# EAGLE board PCB (EAGLE 9.7.0)
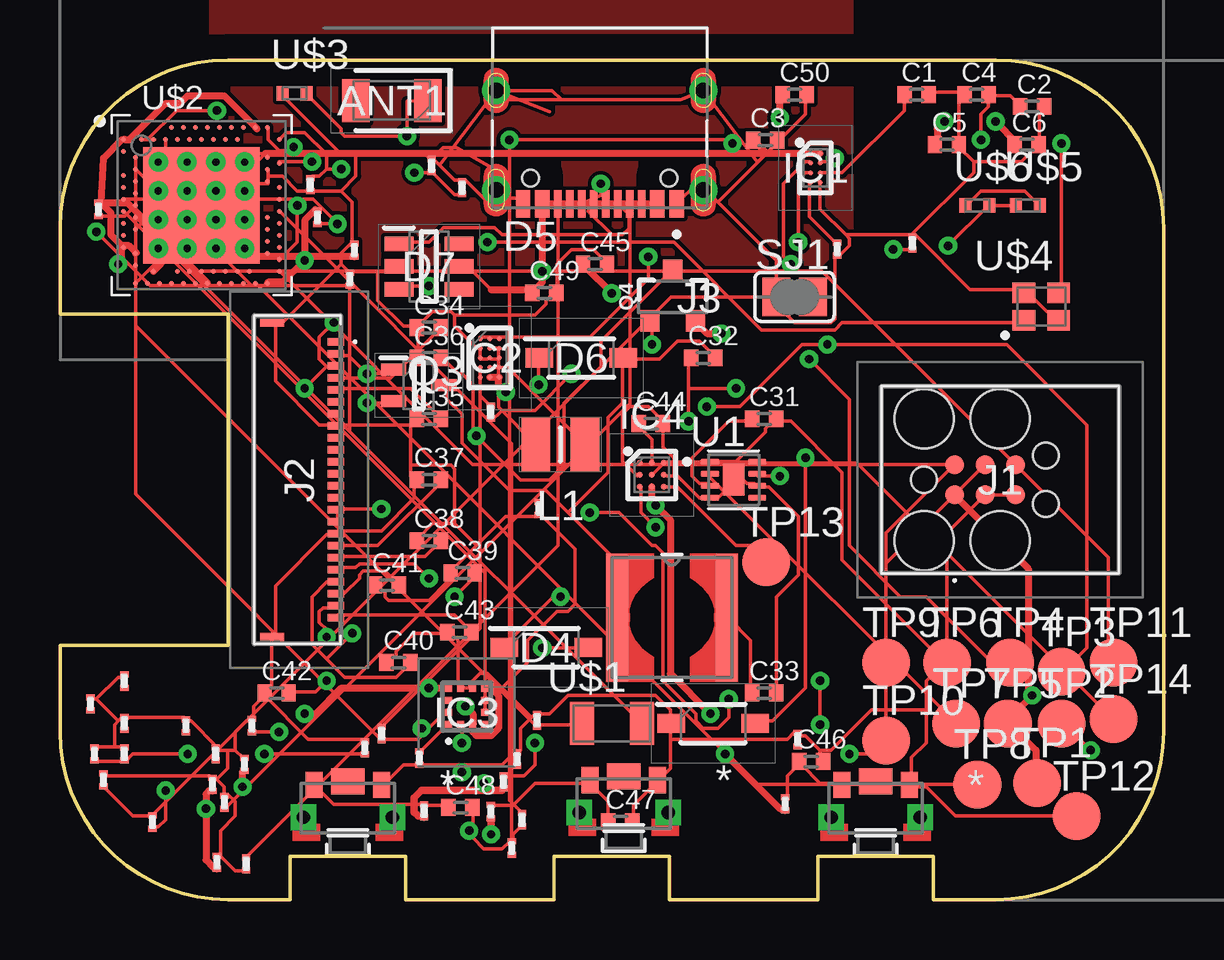
[diagram p0: board, top side]
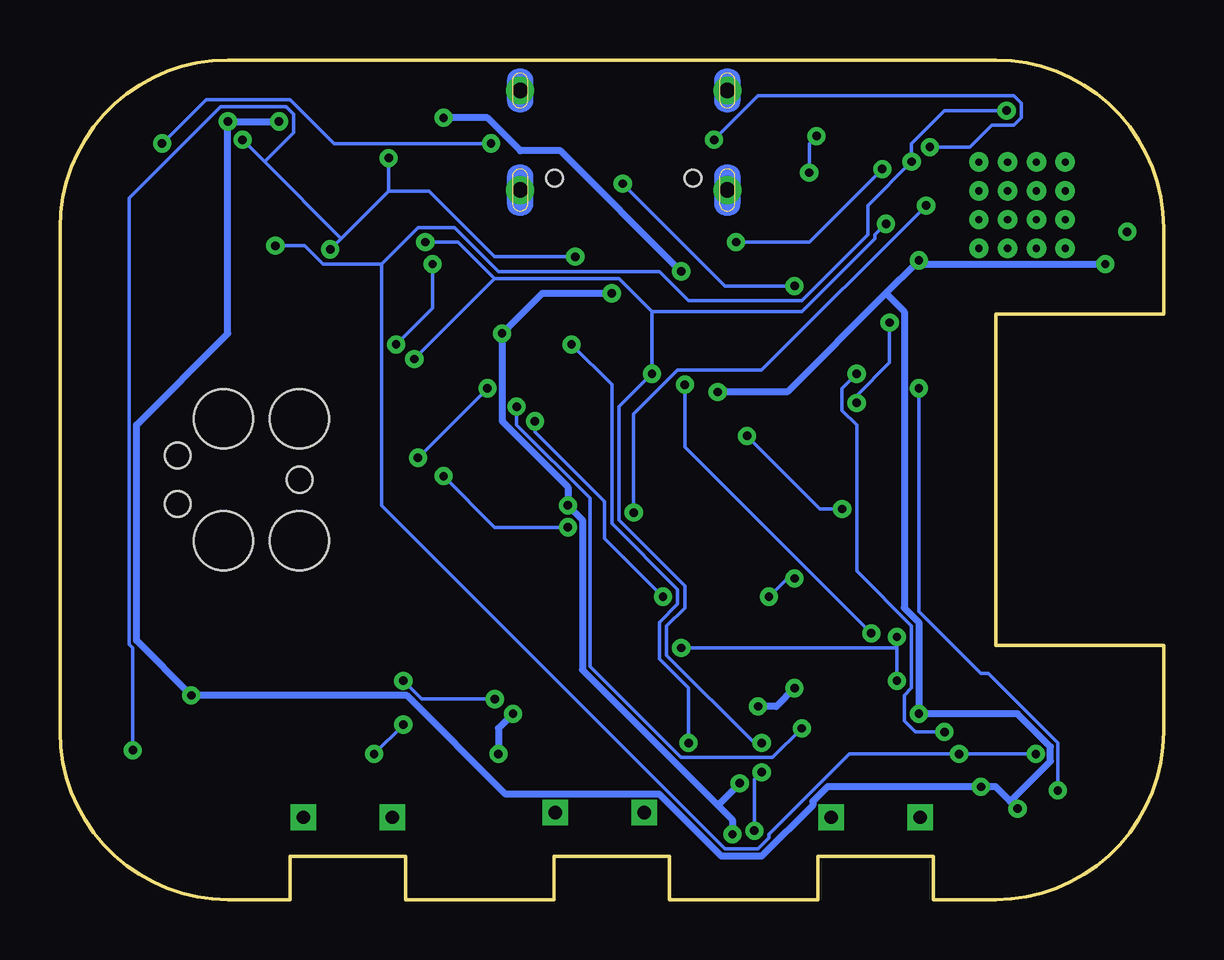
[diagram p1: board, bottom side, seen from below]

Size 46 x 35 mm. Coordinates in mm from the lower left corner, seen from the top.
Outline: 39,0 36.4,0 36.4,1.8 31.6,1.8 31.6,0 25.4,0 25.4,1.8 20.6,1.8 20.6,0 14.4,0 14.4,1.8 9.6,1.8 9.6,0 7,0 arc-90 0,7 0,10.6 7,10.6 7,24.4 0,24.4 0,28 arc-90 7,35 39,35 arc-90 46,28 46,7 arc-90 39,0
Copper layers (1*16): Top 0.035mm / dielectric 1.5mm / Bottom 0.035mm
Design rules "Fusion Electronics Design Rules *": minimum track width 6mil, minimum drill 0.2mm, track to track 6mil, track to pad 6mil, pad to pad 6mil, via to via 6mil, smd to smd 6mil, copper to edge 40mil, drill to drill 6mil, minimum pad ring 10mil, minimum via ring 8mil, stop-mask expansion 4mil, vias tented up to drill 9999mil, thermal gap 10mil

## Footprints (pad centres in the part's own frame; a part is rotated, then mirrored left to right if it is on the bottom)
2450AT18B100E_ANTC3216X140N = smd 1.15 x 1.8: 1 -1.5,0; 2 1.5,0
PERFECT_0402_0402 = smd 0.6 x 0.7: 1 -0.5,0; 2 0.5,0
GRM011R60J152KE01L_1_0201 = smd 0.35 x 0.25: 1 0,0.275; 2 0,-0.275
ESP32_C6_LIBRARY_5_SOD3716X135N = smd 1.15 x 0.8: 1 -1.75,0; 2 1.75,0
ESP32_C6_LIBRARY_3_SOT95P280X145-6N = smd 1.2 x 0.6: 1 -1.25,0.95; 2 -1.25,0; 3 -1.25,-0.95; 4 1.25,-0.95; 5 1.25,0; 6 1.25,0.95
BQ25180YBGR_BGA8C40P2X4_100X155X50 = smd 0.2 x 0.2: A1 -0.2,0.6; A2 0.2,0.6; B1 -0.2,0.2; B2 0.2,0.2; C1 -0.2,-0.2; C2 0.2,-0.2; D1 -0.2,-0.6; D2 0.2,-0.6
RT6160AWSC_BGA15C40P3X5_140X230X60 = smd 0.216 x 0.216: A1 -0.4,0.8; A2 0,0.8; A3 0.4,0.8; B1 -0.4,0.4; B2 0,0.4; B3 0.4,0.4; C1 -0.4,0; C2 0,0; C3 0.4,0; D1 -0.4,-0.4; D2 0,-0.4; D3 0.4,-0.4; E1 -0.4,-0.8; E2 0,-0.8; E3 0.4,-0.8
BMA423_BMA423 = smd 0.3 x 0.35: 1 -0.75,-0.775; 2 -0.25,-0.775; 3 0.25,-0.775; 4 0.75,-0.775; 7 0.75,0.775; 8 0.25,0.775; 9 -0.25,0.775; 10 -0.75,0.775 | smd 0.35 x 0.3: 5 0.775,-0.25; 6 0.775,0.25; 11 -0.775,0.25; 12 -0.775,-0.25
DRV2605YZFR_BGA9C50P3X3_144X144X62 = smd 0.25 x 0.25: A1 -0.5,0.5; A2 0,0.5; A3 0.5,0.5; B1 -0.5,0; B2 0,0; B3 0.5,0; C1 -0.5,-0.5; C2 0,-0.5; C3 0.5,-0.5
TC2030-IDC_TC2030IDC = smd 0.783 x 0.783: 1 -0.953,-0.635; 2 -0.953,0.635; 3 0.317,-0.635; 4 0.317,0.635; 5 1.588,-0.635; 6 1.588,0.635 | hole 2.451: -2.223,-2.54; -2.223,2.54; 0.952,-2.54; 0.952,2.54 | hole 1.067: -2.223,0; 2.857,-1.016; 2.857,1.016
503480-2400_5034802400 = smd 0.3 x 0.7: 1 -5.75,1.525; 2 -5.25,1.525; 3 -4.75,1.525; 4 -4.25,1.525; 5 -3.75,1.525; 6 -3.25,1.525; 7 -2.75,1.525; 8 -2.25,1.525; 9 -1.75,1.525; 10 -1.25,1.525; 11 -0.75,1.525; 12 -0.25,1.525; 13 0.25,1.525; 14 0.75,1.525; 15 1.25,1.525; 16 1.75,1.525; 17 2.25,1.525; 18 2.75,1.525; 19 3.25,1.525; 20 3.75,1.525; 21 4.25,1.525; 22 4.75,1.525; 23 5.25,1.525; 24 5.75,1.525 | smd 0.3 x 1: MP1 -6.54,-1.125; MP2 6.54,-1.125
KH-TYPE-C-16P_KINGHELM_KH-TYPE-C-16P = smd 0.6 x 1.15: A1_B12 -3.2,4.725; A4_B9 -2.4,4.725; A9_B4 2.4,4.725; A12_B1 3.2,4.725 | smd 0.3 x 1.15: A5 -1.25,4.725; A6 -0.25,4.725; A7 0.25,4.725; A8 1.25,4.725; B5 1.75,4.725; B6 0.75,4.725; B7 -0.75,4.725; B8 -1.75,4.725 | drill 0.65 pad 1.05: SH1 -4.32,0; SH2 4.32,0; SH3 -4.32,4.15; SH4 4.32,4.15 | hole 0.7: -2.89,3.65; 2.89,3.65
MLP2016SR47MT0S1_INDC2016X100N = smd 1.2 x 2.2: 1 -1.028,0; 2 1.028,0
ESP32_C6_LIBRARY_2_IND_4828-WE-TPC_WRE = smd 0.9 x 5.3: 1 -2.286,0; 2 2.286,0
ESP32_C6_LIBRARY_6_SOT65P210X110-3N = smd 1.05 x 0.5: 1 -1.05,0.65; 2 -1.05,-0.65; 3 1.05,0
ESP32_C6_LIBRARY_4_ESP32_C6_LIBRARY_4_ESP32_C6_LIBRARY_4_ESP32_C6_LIBRARY_4_ESP32_WROVER_SPARKFUN-DISCRETESEMI_SOT23-3 = smd 0.8 x 0.9: 1 -0.95,-1; 2 0.95,-1; 3 0,1.1
CPF0201D7K68C1_0201 = smd 0.35 x 0.25: 1 0,0.275; 2 0,-0.275
ESP32_C6_LIBRARY_7_JUMPER_SJ = smd 1.168 x 1.6: 1 -0.762,0; 2 0.762,0
2025-10-22_07-23-44_LIBRARY_SW_EVP-AKE31A_PAN = smd 0.711 x 1.092: 1 -1.4,-0.972; 2 1.4,-0.972 | drill 0.559 pad 0.914 square: 3 -1.848,0.381; 4 1.848,0.381 | smd 1.397 x 1.092: 5 0,-1.124
HECTOR_WATCH_1_TP20R = smd 2 x 2: TP 0,0
ESP32_C6_LIBRARY_SON50P200X200X80-9N = smd 0.76 x 0.27: 1 -0.985,0.75; 2 -0.985,0.25; 3 -0.985,-0.25; 4 -0.985,-0.75; 5 0.985,-0.75; 6 0.985,-0.25; 7 0.985,0.25; 8 0.985,0.75 | smd 0.9 x 1.3: 9 0,0
NORDIC_NRF_1_XTAL_3215_N = smd 1 x 1.8: 1 -1.25,0; 2 1.25,0
NORDIC_NRF_4_AQFN50P700X700X85_HS-74N = smd 4.85 x 4.85: P$74 0,0 | drill 0.3 pad 0.6: P$75 -1.8,1.8; P$76 -0.6,1.8; P$77 0.6,1.8; P$78 1.8,1.8; P$79 -1.8,0.6; P$80 -0.6,0.6; P$81 0.6,0.6; P$82 1.8,0.6; P$83 -1.8,-0.6; P$84 -0.6,-0.6; P$85 0.6,-0.6; P$86 1.8,-0.6; P$87 -1.8,-1.8; P$88 -0.6,-1.8; P$89 0.6,-1.8; P$90 1.8,-1.8 | smd 0.2 x 0.2: P$A8 -1.25,3.25; P$A10 -0.75,3.25; P$A12 -0.25,3.25; P$A14 0.25,3.25; P$A16 0.75,3.25; P$A18 1.25,3.25; P$A20 1.75,3.25; P$A22 2.25,3.25; P$A23 2.75,3.25; P$AA24 3.25,-2.25; P$AB2 -2.75,-2.5; P$AC5 -2,-2.75; P$AC9 -1,-2.75; P$AC11 -0.5,-2.75; P$AC13 0,-2.75; P$AC15 0.5,-2.75; P$AC17 1,-2.75; P$AC19 1.5,-2.75; P$AC21 2,-2.75; P$AC24 3.25,-2.75; P$AD2 -2.75,-3.25; P$AD4 -2.25,-3.25; P$AD6 -1.75,-3.25; P$AD8 -1.25,-3.25; P$AD10 -0.75,-3.25; P$AD12 -0.25,-3.25; P$AD14 0.25,-3.25; P$AD16 0.75,-3.25; P$AD18 1.25,-3.25; P$AD20 1.75,-3.25; P$AD22 2.25,-3.25; P$AD23 2.75,-3.25; P$B1 -3.25,2.75; P$B3 -2.5,2.75; P$B5 -2,2.75; P$B7 -1.5,2.75; P$B9 -1,2.75; P$B11 -0.5,2.75; P$B13 0,2.75; P$B15 0.5,2.75; P$B17 1,2.75; P$B19 1.5,2.75; P$B24 3.25,2.75; P$C1 -3.25,2.25; P$D2 -2.75,2; P$D23 2.75,2; P$E24 3.25,1.75; P$F2 -2.75,1.5; P$F23 2.75,1.5; P$G1 -3.25,1.25; P$H2 -2.75,1; P$H23 2.75,1; P$J1 -3.25,0.75; P$J24 3.25,0.75; P$K2 -2.75,0.5; P$L1 -3.25,0.25; P$L24 3.25,0.25; P$M2 -2.75,0; P$N1 -3.25,-0.25; P$N24 3.25,-0.25; P$P2 -2.75,-0.5; P$P23 2.75,-0.5; P$R1 -3.25,-0.75; P$R24 3.25,-0.75; P$T2 -2.75,-1; P$T23 2.75,-1; P$U1 -3.25,-1.25; P$U24 3.25,-1.25; P$V23 2.75,-1.5; P$W1 -3.25,-1.75; P$W24 3.25,-1.75; P$Y2 -2.75,-2; P$Y23 2.75,-2
NORDIC_NRF_2_RESC0402_L = smd 0.5 x 0.6: 1 -0.5,0; 2 0.5,0
NORDIC_NRF_BT-XTAL_2016_N = smd 0.95 x 0.85: 1 -0.725,-0.575; 2 0.725,-0.575; 3 0.725,0.575; 4 -0.725,0.575

## Placement (x,y rotation side)
ANT1  2450AT18B100E_2450AT18B100E  [2450AT18B100E_ANTC3216X140N]  13.84,33.31 180 top
C1  1uF  [PERFECT_0402_0402]  35.7,33.56 0 top
C2  10uf  [PERFECT_0402_0402]  40.51,33.06 0 top
C3  1uf  [PERFECT_0402_0402]  29.4,31.66 0 top
C4  10uF  [PERFECT_0402_0402]  38.2,33.56 0 top
C5  22uF  [PERFECT_0402_0402]  36.97,31.47 0 top
C6  22uF  [PERFECT_0402_0402]  40.3,31.47 0 top
C7  0.1uF  [GRM011R60J152KE01L_1_0201]  35.53,27.36 0 top
C8  100nF  [GRM011R60J152KE01L_1_0201]  6.54,1.55 0 top
C9  12pF  [GRM011R60J152KE01L_1_0201]  19.88,7.47 0 top
C10  12pF  [GRM011R60J152KE01L_1_0201]  12.08,25.87 0 top
C11  12pF  [GRM011R60J152KE01L_1_0201]  19.26,3.33 0 top
C12  12pF  [GRM011R60J152KE01L_1_0201]  10.43,29.8 0 top
C13  1pF  [GRM011R60J152KE01L_1_0201]  19.96,16.3 0 top
C14  1pF  [GRM011R60J152KE01L_1_0201]  16.76,29.68 0 top
C15  N.C.  [GRM011R60J152KE01L_1_0201]  15.49,30.59 0 top
C16  820pF  [GRM011R60J152KE01L_1_0201]  18.83,2.14 0 top
C17  100nF  [GRM011R60J152KE01L_1_0201]  6.35,4.8 0 top
C18  4.7uF  [GRM011R60J152KE01L_1_0201]  6.49,6.07 0 top
C19  4.7uF  [GRM011R60J152KE01L_1_0201]  19.05,5.85 0 top
C20  4.7uF  [GRM011R60J152KE01L_1_0201]  2.68,9.11 0 top
C21  4.7uF  [GRM011R60J152KE01L_1_0201]  12.27,27.07 0 top
C22  100nF  [GRM011R60J152KE01L_1_0201]  7.68,5.64 0 top
C23  100nF  [GRM011R60J152KE01L_1_0201]  1.27,8.16 0 top
C24  100pF  [GRM011R60J152KE01L_1_0201]  2.68,7.34 0 top
C25  N.C.  [GRM011R60J152KE01L_1_0201]  5.25,7.24 0 top
C26  N.C.  [GRM011R60J152KE01L_1_0201]  12.71,6.33 0 top
C27  1.0uF  [GRM011R60J152KE01L_1_0201]  1.44,6.08 0 top
C28  47nF  [GRM011R60J152KE01L_1_0201]  2.68,6.07 0 top
C29  100nF  [GRM011R60J152KE01L_1_0201]  30.75,6.67 0 top
C31  0.1uF  [PERFECT_0402_0402]  29.35,20.04 0 top
C32  4.7uF/25V  [PERFECT_0402_0402]  26.81,22.58 0 top
C33  10uF  [PERFECT_0402_0402]  29.35,8.61 0 top
C34  1uF/50V  [PERFECT_0402_0402]  15.38,23.85 0 top
C35  1uF/50V  [PERFECT_0402_0402]  15.38,20.04 0 top
C36  0.1uF/50V  [PERFECT_0402_0402]  15.38,22.58 0 top
C37  1uF/50V  [PERFECT_0402_0402]  15.38,17.5 0 top
C38  1uF/50V  [PERFECT_0402_0402]  15.38,14.96 0 top
C39  1uF/50V  [PERFECT_0402_0402]  16.78,13.62 0 top
C40  1uF/50V  [PERFECT_0402_0402]  14.11,9.88 0 top
C41  1uF/50V  [PERFECT_0402_0402]  13.63,13.11 0 top
C42  1uF/50V  [PERFECT_0402_0402]  9.03,8.61 0 top
C43  1uF/50V  [PERFECT_0402_0402]  16.65,11.15 0 top
C44  1uF  [PERFECT_0402_0402]  24.63,19.84 0 top
C45  0.1uF  [PERFECT_0402_0402]  22.3,26.49 0 top
C46  1uF  [PERFECT_0402_0402]  31.31,5.76 0 top
C47  1uF  [PERFECT_0402_0402]  23.36,3.24 0 top
C48  1uF  [PERFECT_0402_0402]  16.69,3.84 0 top
C49  0.1uF  [PERFECT_0402_0402]  20.19,25.29 0 top
C50  4.7uF  [PERFECT_0402_0402]  30.62,33.56 0 top
D4  ESP32_C6_LIBRARY_5_MBR0530  [ESP32_C6_LIBRARY_5_SOD3716X135N]  20.27,10.51 0 top
D5  ESP32_C6_LIBRARY_5_MBR0530  [ESP32_C6_LIBRARY_5_SOD3716X135N]  27.23,7.34 0 top
D6  ESP32_C6_LIBRARY_5_MBR0530  [ESP32_C6_LIBRARY_5_SOD3716X135N]  21.73,22.58 0 top
D7  ESP32_C6_LIBRARY_3_USBLC6-2SC6Y  [ESP32_C6_LIBRARY_3_SOT95P280X145-6N]  15.38,26.39 0 top
IC1  BQ25180YBGR_BQ25180YBGR  [BQ25180YBGR_BGA8C40P2X4_100X155X50]  31.49,30.5 0 top
IC2  RT6160AWSC_RT6160AWSC  [RT6160AWSC_BGA15C40P3X5_140X230X60]  17.92,22.58 0 top
IC3  BMA423_BMA423  [BMA423_BMA423]  16.95,8.05 0 top
IC4  DRV2605YZFR_DRV2605YZFR  [DRV2605YZFR_BGA9C50P3X3_144X144X62]  24.67,17.7 0 top
J1  TC2030-IDC_TC2030-IDC  [TC2030-IDC_TC2030IDC]  38.24,17.5 0 top
J2  503480-2400_503480-2400  [503480-2400_5034802400]  9.97,17.5 270 top
J3  KH-TYPE-C-16P_KH-TYPE-C-16P  [KH-TYPE-C-16P_KINGHELM_KH-TYPE-C-16P]  22.5,33.73 180 top
L1  MLP2016SR47MT0S1_FTC252012SR47MBCA  [MLP2016SR47MT0S1_INDC2016X100N]  20.86,18.97 0 top
L3  68uH  [ESP32_C6_LIBRARY_2_IND_4828-WE-TPC_WRE]  25.51,11.76 0 top
Q3  ESP32_C6_LIBRARY_6_SI1308EDL-T1-GE3  [ESP32_C6_LIBRARY_6_SOT65P210X110-3N]  14.95,21.44 0 top
Q4  20V/4.2A/52mΩ/1.4W  [ESP32_C6_LIBRARY_4_ESP32_C6_LIBRARY_4_ESP32_C6_LIBRARY_4_ESP32_C6_LIBRARY_4_ESP32_WROVER_SPARKFUN-DISCRETESEMI_SOT23-3]  25.54,25.12 0 top
R1  CPF0201D7K68C1_CPF0201D7K68C1  [CPF0201D7K68C1_0201]  32.39,27.11 0 top
R2  0  [CPF0201D7K68C1_0201]  17.95,20.32 0 top
R3  0  [CPF0201D7K68C1_0201]  13.41,6.92 0 top
R4  3K3  [CPF0201D7K68C1_0201]  1.6,28.77 0 top
R5  3K3  [CPF0201D7K68C1_0201]  10.73,28.44 0 top
R6  0  [CPF0201D7K68C1_0201]  14.98,5.9 0 top
R7  0.47  [CPF0201D7K68C1_0201]  3.85,3.23 0 top
R8  10K  [CPF0201D7K68C1_0201]  8,7.25 0 top
R9  2.2  [CPF0201D7K68C1_0201]  1.81,4.99 0 top
R10  10K  [CPF0201D7K68C1_0201]  18.49,4.9 0 top
R11  10k  [CPF0201D7K68C1_0201]  30.22,3.99 0 top
R12  10k  [CPF0201D7K68C1_0201]  17.95,3.66 0 top
R13  10k  [CPF0201D7K68C1_0201]  15.18,3.69 0 top
R14  5K1  [CPF0201D7K68C1_0201]  6.85,4.05 0 top
R15  5K1  [CPF0201D7K68C1_0201]  7.76,1.49 0 top
SJ1  [ESP32_C6_LIBRARY_7_JUMPER_SJ]  30.62,25.12 0 top
SW1  2025-10-22_07-23-44_LIBRARY_EVP-AKE31ASW_EVP-AKE31A_PAN  [2025-10-22_07-23-44_LIBRARY_SW_EVP-AKE31A_PAN]  34,3.81 180 top
SW2  2025-10-22_07-23-44_LIBRARY_EVP-AKE31ASW_EVP-AKE31A_PAN  [2025-10-22_07-23-44_LIBRARY_SW_EVP-AKE31A_PAN]  23.5,4.01 180 top
SW3  2025-10-22_07-23-44_LIBRARY_EVP-AKE31ASW_EVP-AKE31A_PAN  [2025-10-22_07-23-44_LIBRARY_SW_EVP-AKE31A_PAN]  12,3.81 180 top
TP1  HECTOR_WATCH_1_TPTP20R  [HECTOR_WATCH_1_TP20R]  40.72,4.86 0 top
TP2  HECTOR_WATCH_1_TPTP20R  [HECTOR_WATCH_1_TP20R]  41.76,7.34 0 top
TP3  HECTOR_WATCH_1_TPTP20R  [HECTOR_WATCH_1_TP20R]  41.76,9.49 0 top
TP4  HECTOR_WATCH_1_TPTP20R  [HECTOR_WATCH_1_TP20R]  39.6,9.88 0 top
TP5  HECTOR_WATCH_1_TPTP20R  [HECTOR_WATCH_1_TP20R]  39.51,7.34 0 top
TP6  HECTOR_WATCH_1_TPTP20R  [HECTOR_WATCH_1_TP20R]  36.97,9.88 0 top
TP7  HECTOR_WATCH_1_TPTP20R  [HECTOR_WATCH_1_TP20R]  37.36,7.34 0 top
TP8  HECTOR_WATCH_1_TPTP20R  [HECTOR_WATCH_1_TP20R]  38.24,4.8 0 top
TP9  HECTOR_WATCH_1_TPTP20R  [HECTOR_WATCH_1_TP20R]  34.43,9.88 0 top
TP10  HECTOR_WATCH_1_TPTP20R  [HECTOR_WATCH_1_TP20R]  34.43,6.63 0 top
TP11  HECTOR_WATCH_1_TPTP20R  [HECTOR_WATCH_1_TP20R]  43.91,9.88 0 top
TP12  HECTOR_WATCH_1_TPTP20R  [HECTOR_WATCH_1_TP20R]  42.38,3.47 0 top
TP13  HECTOR_WATCH_1_TPTP20R  [HECTOR_WATCH_1_TP20R]  29.43,14.06 0 top
TP14  HECTOR_WATCH_1_TPTP20R  [HECTOR_WATCH_1_TP20R]  43.91,7.52 0 top
U1  ESP32_C6_LIBRARY_MAX17048G+T10  [ESP32_C6_LIBRARY_SON50P200X200X80-9N]  28.08,17.5 0 top
U$1  32.768kHz  [NORDIC_NRF_1_XTAL_3215_N]  23,7.34 0 top
U$2  NORDIC_NRF_4_NRF52840_QF  [NORDIC_NRF_4_AQFN50P700X700X85_HS-74N]  5.9,28.94 0 top
U$3  3.9nH  [NORDIC_NRF_2_RESC0402_L]  9.78,33.61 0 top
U$4  32MHz  [NORDIC_NRF_BT-XTAL_2016_N]  40.9,24.72 0 top
U$5  15nH  [NORDIC_NRF_2_RESC0402_L]  40.35,28.93 0 top
U$6  10uH  [NORDIC_NRF_2_RESC0402_L]  38.24,28.93 0 top

## Library data of the parts
ANT1 = InkTime_v5; ARROW_PART_NUMBER: 2450AT18B100E; ARROW_PRICE-STOCK: https://www.arrow.com/en/products/2450at18b100e/johanson-dielectrics?utm_currency=USD&region=nac; DESCRIPTION: Antennas 2.45GHz ANTENNA; HEIGHT: 1.4mm; MANUFACTURER_NAME: JOHANSON TECHNOLOGY; MANUFACTURER_PART_NUMBER: 2450AT18B100E; MOUSER_PART_NUMBER: 609-2450AT18B100E; MOUSER_PRICE-STOCK: https://www.mouser.co.uk/ProductDetail/Johanson-Technology/2450AT18B100E?qs=yCnrNFeXz%252Bh5MFsFIXGZGA%3D%3D
C1-C29 C31-C50 R1-R15 SJ1 TP1-TP14 U$1-U$6 = InkTime_v5
D4-D6 = InkTime_v5; AVAILABILITY: In Stock; CHECK_PRICES: https://www.snapeda.com/parts/MBR0530/Onsemi/view-part/?ref=eda; DESCRIPTION: Diode Schottky 30 V 500mA Surface Mount SOD-123; MF: ON Semiconductor; MP: MBR0530; PACKAGE: SOD-123-2 ON Semiconductor; PRICE: None; PURCHASE-URL: https://www.snapeda.com/api/url_track_click_mouser/?unipart_id=179458&manufacturer=ON Semiconductor&part_name=MBR0530&search_term=None; SNAPEDA_LINK: https://www.snapeda.com/parts/MBR0530/Onsemi/view-part/?ref=snap
D7 = InkTime_v5; AVAILABILITY: In Stock; CHECK_PRICES: https://www.snapeda.com/parts/USBLC6-2SC6Y/STMicroelectronics/view-part/?ref=eda; DESCRIPTION: 17V Clamp 5A (8/20µs) Ipp Tvs Diode Surface Mount SOT-23-6; MF: STMicroelectronics; MP: USBLC6-2SC6Y; PACKAGE: SOT-23-6 STMicroelectronics; PRICE: None; SNAPEDA_LINK: https://www.snapeda.com/parts/USBLC6-2SC6Y/STMicroelectronics/view-part/?ref=snap
IC1 = InkTime_v5; ARROW_PART_NUMBER: BQ25180YBGR; ARROW_PRICE-STOCK: https://www.arrow.com/en/products/bq25180ybgr/texas-instruments?utm_currency=USD&region=nac; DESCRIPTION: Charger IC Lithium Ion/Polymer, Lithium Iron Phosphate 8-DSBGA (1.6x1.1); HEIGHT: 0.5mm; MANUFACTURER_NAME: Texas Instruments; MANUFACTURER_PART_NUMBER: BQ25180YBGR; MOUSER_PART_NUMBER: 595-BQ25180YBGR; MOUSER_PRICE-STOCK: https://www.mouser.co.uk/ProductDetail/Texas-Instruments/BQ25180YBGR?qs=doiCPypUmgEWjAK%252BJAX6Tw%3D%3D
IC2 = InkTime_v5; DESCRIPTION: Buck-Boost Regulator Positive Output Step-Up/Step-Down I2C DC-DC Controller IC 15-WL-CSP (BSC) (1.4x2.3); HEIGHT: 0.6mm; MANUFACTURER_NAME: RICHTEK; MANUFACTURER_PART_NUMBER: RT6160AWSC; MOUSER_PART_NUMBER: 835-RT6160AWSC; MOUSER_PRICE-STOCK: https://www.mouser.co.uk/ProductDetail/Richtek/RT6160AWSC?qs=amGC7iS6iy%2FLd9PSoixZXQ%3D%3D
IC3 = InkTime_v5; ARROW_PART_NUMBER: BMA423; ARROW_PRICE-STOCK: https://www.arrow.com/en/products/bma423/bosch; DESCRIPTION: Accelerometers Triaxial low-g 12bit Acceleration Sensor; HEIGHT: 1mm; MANUFACTURER_NAME: BOSCH; MANUFACTURER_PART_NUMBER: BMA423; MOUSER_PART_NUMBER: 262-BMA423; MOUSER_PRICE-STOCK: https://www.mouser.co.uk/ProductDetail/Bosch-Sensortec/BMA423?qs=HXFqYaX1Q2xC%252BSgeGoX3mg%3D%3D
IC4 = InkTime_v5; ARROW_PART_NUMBER: DRV2605YZFR; ARROW_PRICE-STOCK: https://www.arrow.com/en/products/drv2605yzfr/texas-instruments?region=nac; DESCRIPTION: Haptic Driver for ERM/LRA with Built-In Library and Smart Loop Architecture; HEIGHT: 0.625mm; MANUFACTURER_NAME: Texas Instruments; MANUFACTURER_PART_NUMBER: DRV2605YZFR
J1 = InkTime_v5; DESCRIPTION: CABLE ADAPTER 6 POS; HEIGHT: 19mm; MANUFACTURER_NAME: Tag Connect; MANUFACTURER_PART_NUMBER: TC2030-IDC
J2 = InkTime_v5; DESCRIPTION: FFC & FPC Connectors 0.5mm FPC RA SMT Dual Contact 24Ckt; HEIGHT: 1.87mm; MANUFACTURER_NAME: Molex; MANUFACTURER_PART_NUMBER: 503480-2400; MOUSER_PART_NUMBER: 538-503480-2400; MOUSER_PRICE-STOCK: https://www.mouser.co.uk/ProductDetail/Molex/503480-2400?qs=OAhjpuo3Vu7efIoxFh9AOw%3D%3D
J3 = InkTime_v5; AVAILABILITY: Not in stock; CHECK_PRICES: https://www.snapeda.com/parts/KH-TYPE-C-16P/Kinghelm/view-part/?ref=eda; MF: kinghelm; MP: KH-TYPE-C-16P; PACKAGE: None; PRICE: None; SNAPEDA_LINK: https://www.snapeda.com/parts/KH-TYPE-C-16P/Kinghelm/view-part/?ref=snap
L1 = InkTime_v5; DESCRIPTION: SMD / SMT Inductors (Coils), L=0.47?H, L x W x T :; HEIGHT: 1mm; JLCPCB: https://jlcpcb.com/partdetail/6763488-FTC252012SR47MBCA/C5832368; MANUFACTURER_NAME: TDK; MANUFACTURER_PART_NUMBER: FTC252012SR47MBCA
L3 = InkTime_v5; COPYRIGHT: Copyright (C) 2024 Ultra Librarian. All rights reserved.; MANUFACTURER_PART_NUMBER: 744043680; MFR_NAME: Wurth Electronics
Q3 = InkTime_v5; AVAILABILITY: In Stock; CHECK_PRICES: https://www.snapeda.com/parts/SI1308EDL-T1-GE3/Vishay+Siliconix/view-part/?ref=eda; DESCRIPTION: Si1308EDL-T1-GE3 N-channel MOSFET Transistor, 1.5 A, 30 V, 3-Pin SC-70 | Siliconix / Vishay SI1308EDL-T1-GE3; MF: Vishay Siliconix; MP: SI1308EDL-T1-GE3; PACKAGE: SOT-323 Vishay Semiconductor; PRICE: None; PURCHASE-URL: https://www.snapeda.com/api/url_track_click_mouser/?unipart_id=274603&manufacturer=Vishay Siliconix&part_name=SI1308EDL-T1-GE3&search_term=None; SNAPEDA_LINK: https://www.snapeda.com/parts/SI1308EDL-T1-GE3/Vishay+Siliconix/view-part/?ref=snap
Q4 = InkTime_v5; PROD_ID: TRAN-14388
SW1-SW3 = InkTime_v5; COPYRIGHT: Copyright (C) 2025 Ultra Librarian. All rights reserved.; DIGI-KEY_PART_NUMBER_1: P123437TR-ND; DIGI-KEY_PART_NUMBER_2: P123437CT-ND; DIGI-KEY_PART_NUMBER_3: P123437DKR-ND; MANUFACTURER_NAME: Panasonic; MANUFACTURER_PART_NUMBER: EVP-AKE31A
U1 = InkTime_v5; AVAILABILITY: In Stock; CHECK_PRICES: https://www.snapeda.com/parts/MAX17048G+T10/Analog+Devices/view-part/?ref=eda; DESCRIPTION: 3µA 1-Cell/2-Cell Fuel Gauge with ModelGauge; MF: Analog Devices; MP: MAX17048G+T10; PACKAGE: TDFN-8 Maxim; PRICE: None; PURCHASE-URL: https://www.snapeda.com/api/url_track_click_mouser/?unipart_id=329239&manufacturer=Analog Devices&part_name=MAX17048G+T10&search_term=None; SNAPEDA_LINK: https://www.snapeda.com/parts/MAX17048G+T10/Analog+Devices/view-part/?ref=snap

## Nets
3V3: C45.1 IC4.C2 Q4.2 R10.2 R11.2 R12.2 R13.2
3V3/2.4A: C5.1 C6.1 C8.2 C17.2 C22.2 IC2.E2 IC2.E3 IC3.3 IC3.7 IC3.10 J1.1 R4.1 R5.1 TP1.TP TP5.TP U$2.P$A22 U$2.P$AD14 U$2.P$AD23 U$2.P$B1 U$2.P$W1 U$2.P$Y2
3V3/2.4A1: C18.2
3V3/2.4A2: C20.2
3V3/2.4A3: C21.2 U$2.P$AC5
3V3/2.4A4: C23.2
3V3/2.4A5: C19.2
3V3/2.4A6: C24.2
3V3/2.4A7: C25.2
3V3/2.4A8: C29.2
ALERT: U1.5
ALERT/2.5C: U$2.P$J24
D+: D7.4
D+/2.7D: U$2.P$AD6
D-: D7.6
D-/2.7D: U$2.P$AD4
DEC1: U$2.P$C1
DEC3: U$2.P$D23
DEC4_6: C26.2 C27.2 C28.2 U$2.P$B3 U$2.P$B5 U$2.P$E24 U$5.1 U$6.2
DN: D7.1 J3.A7 J3.B7
DP: D7.3 J3.A6 J3.B6
EPD_3V3: C36.2 J2.15 J2.16 Q4.3
EPD_BUSY: J2.9
EPD_BUSY/2.2D: U$2.P$AD12
EPD_CS: J2.12
EPD_CS/2.2D: U$2.P$K2
EPD_DC: J2.11
EPD_DC/2.2D: U$2.P$AD10
EPD_RST: J2.10
EPD_RST/2.2D: U$2.P$AC11
GDR: J2.2 Q3.1 R8.2
GND: C1.2 C2.2 C3.2 C4.1 C5.2 C6.2 C7.1 C8.1 C9.1 C10.1 C11.2 C12.2 C13.1 C13.2 C14.1 C15.1 C16.1 C17.1 C18.1 C19.1 C20.1 C21.1 C22.1 C23.1 C24.1 C25.1 C26.1 C27.1 C28.1 C29.1 C31.2 C33.2 C34.1 C35.1 C36.1 C37.1 C38.1 C39.1 C40.1 C41.1 C42.1 C43.1 C44.2 C45.2 C46.2 C47.2 C48.2 C49.2 C50.2 D5.1 D7.2 IC1.D2 IC2.B1 IC2.C1 IC2.C2 IC2.C3 IC3.8 IC3.9 IC4.B1 IC4.B3 J1.3 J1.5 J2.8 J2.17 J2.MP1 J2.MP2 J3.A1_B12 J3.A12_B1 J3.SH1 J3.SH2 J3.SH3 J3.SH4 R1.2 R6.2 R8.1 R9.1 R14.1 R15.2 SJ1.1 SW1.1 SW2.1 SW3.1 TP6.TP TP12.TP U1.1 U1.4 U1.6 U1.9 U$2.P$74 U$2.P$75 U$2.P$76 U$2.P$77 U$2.P$78 U$2.P$79 U$2.P$80 U$2.P$81 U$2.P$82 U$2.P$83 U$2.P$84 U$2.P$85 U$2.P$86 U$2.P$87 U$2.P$88 U$2.P$89 U$2.P$90 U$2.P$B7 U$2.P$F23 U$2.P$H23 U$3.1 U$4.2 U$4.4
HAPTIC_EN: IC4.A1
HAPTIC_EN/2.6A: U$2.P$U1
IMU_INT1: IC3.5 U$2.P$N1
IMU_INT2: IC3.6 U$2.P$P2
LX1: IC2.B2 IC2.B3 L1.1
LX2: IC2.D2 IC2.D3 L1.2
MOSI: J2.14
MOSI/2.2D: U$2.P$B13
N$1: IC1.D1 R1.1
N$2: IC2.E1 R2.1
N$3: IC3.1 R6.1
N$4: IC2.D1 R3.1
N$5: U$5.2 U$6.1
N$6: C11.1 U$2.P$A23 U$4.3
N$7: C12.1 U$2.P$B24 U$4.1
N$8: C16.2 U$2.P$N24
N$10: U$2.P$A18
N$15: C33.1 L3.2
N$16: C32.2 D6.2 L3.1 Q3.3
N$17: C32.1 D4.1 D5.2
N$18: C34.2 J2.4
N$19: C31.1 U1.3
N$20: C35.2 J2.5
N$21: C44.1 IC4.A2
N$23: R7.1 R9.2 SJ1.2
N$24: C37.2 J2.18
N$25: C38.2 J2.19
N$26: C39.2 J2.20
N$27: J3.B5 R15.1
N$28: C41.2 J2.22
N$29: J3.A5 R14.2
N$30: C43.2 J2.24
OUT+: IC4.A3 TP14.TP
OUT-: IC4.C3 TP13.TP
P0.00/XL1: C9.2 U$1.1 U$2.P$D2
P0.01/XL2: C10.2 U$1.2 U$2.P$F2
P0.04: U$2.P$J1
P0.09: U$2.P$L24
P0.13: C46.1 R11.1 SW1.2
P0.13/2.6C: U$2.P$AD8
P0.14: C47.1 R12.1 SW2.2
P0.14/2.7C: U$2.P$AC9
P0.19: U$2.P$AC15
P0.20: U$2.P$AD16
P0.21: U$2.P$AC17
P0.22: U$2.P$AD18
P0.23: U$2.P$AC19
P0.24: U$2.P$AD20
P0.25: U$2.P$AC21
P0.26: U$2.P$G1
P0.27: U$2.P$H2
P0.28: U$2.P$B11
P0.29: U$2.P$A10
P0.30: U$2.P$B9
P0.31: U$2.P$A8
P1.01: Q4.1 R10.1
P1.01/2.4B: U$2.P$Y23
P1.02: C48.1 R13.1 SW3.2
P1.02/2.8C: U$2.P$W24
P1.03: U$2.P$V23
P1.04: U$2.P$U24
P1.05: U$2.P$T23
P1.06: U$2.P$R24
P1.07: U$2.P$P23
P1.09: U$2.P$R1
P1.10: U$2.P$A20
P1.11: U$2.P$B19
P1.12: U$2.P$B17
P1.13: U$2.P$A16
P1.14: U$2.P$B15
P1.15: U$2.P$A14
PMIC_INT: IC1.A1 U$2.P$T2
PREVGH: C40.2 D6.1 J2.21
PREVGL: C42.2 D4.2 J2.23
RESE: J2.3 Q3.2 R7.2
RESET: J1.6 TP11.TP U$2.P$AC13
RF: ANT1.1 C14.2 C15.2 U$3.2
SCK: J2.13
SCK/2.2D: U$2.P$A12
SCL: IC4.C1 U1.7
SCL/2.4C: IC1.B1 IC3.12 R3.2 R4.2 TP3.TP U$2.P$M2
SDA: IC4.B2 U1.8
SDA/2.4C: IC1.C1 IC3.2 R2.2 R5.2 TP4.TP U$2.P$L1
SWDCLK: J1.4 TP10.TP U$2.P$AA24
SWDIO: J1.2 TP9.TP U$2.P$AC24
SWO: TP8.TP U$2.P$AD22
VBAT: TP7.TP U1.2
VBAT/2.5C: C1.1 IC1.C2
VBUS: C49.1 C50.1 D7.5 J3.A4_B9 J3.A9_B4
VBUS/2.6D: C3.1 IC1.A2 U$2.P$AD2
VREG: C2.1 C4.2 C7.2 IC1.B2 IC2.A1 IC2.A2 IC2.A3 TP2.TP

## Tracks (layer width: path | path; a pad name or v marks a point on that pad's centre or on a via)
3V3  (via drill 0.35)
  Top 0.3: 14.77,3.63 14.92,3.48 15.07,3.48 R13.2 | 15.07,4.55 14.77,4.24 | 18.43,4.55 R10.2 | v27.57,23.6 26.96,23.6 26.5,24.05 Q4.2 | IC4.C2 24.68,16.59 v24.83,16.43 25.44,15.82 25.44,9.42 v27.12,7.75 | 17.97,3.33 R12.2 | v27.72,6.07 30.01,3.78 30.16,3.78 R11.2 | v23,25.27 21.93,26.34 C45.1 | v17.67,4.85 17.67,4.55
  Top 0.305: 14.77,4.24 14.77,3.63 | 18.43,4.55 17.67,4.55 15.07,4.55 | v17.97,2.72 17.97,3.33
  Bottom 0.3: v17.97,2.72 17.97,3.33 18.58,3.94 | 18.58,3.94 24.22,9.57 24.22,15.82 v24.83,16.43 24.83,17.2 27.57,19.94 v27.57,23.6 25.9,25.27 v23,25.27 | v27.72,6.07 27.72,7.14 v27.12,7.75 | 18.58,3.94 v17.67,4.85
3V3/2.4A  (via drill 0.35)
  Top 0.3: v36.87,32.44 36.56,32.13 36.56,31.52 C5.1 | v39,32.44 39.92,31.52 C6.1 | TP1.TP 40.68,5 40.68,6.22 39.61,7.29 TP5.TP 39.46,7.44 40.36,8.34 | 40.36,8.34 v40.53,8.51 | IC3.7 17.82,8.97 18.28,8.51 18.28,7.14 17.97,6.83 17.36,6.83 17.21,6.98 17.21,7.14 IC3.3 17.21,7.75 v16.9,8.05 | C8.2 6.39,1.35 6.08,1.65 v6.08,3.78 6.08,4.39 6.24,4.55 C17.2 | v7.61,4.7 7.61,5.31 C22.2 | v10.2,7.75 10.66,7.75 11.72,8.81 v15.38,8.81 16.14,8.81 IC3.10 | 2.58,27.25 2.88,27.25 3.19,26.95 U$2.P$Y2 | 1.71,29.04 1.82,30.91 2.58,31.67 U$2.P$B1 2.73,31.67 2.88,31.67 4.41,33.2 5.02,33.2 5.32,33.5 6.85,33.5 8.22,32.13 U$2.P$A22 | 2.58,27.25 2.12,27.71 2.12,28.62 1.71,29.04 | 1.71,29.04 1.66,29.08 R4.1 2.8,29.05 U$2.P$AD14 | 18.28,21.77 17.97,21.77 IC2.E2 | U$2.P$AD23 8.67,25.73 9.28,25.73 v10.2,26.64 10.2,28.32 10.66,28.78 R5.1 | 18.28,21.77 18.28,21.46 v18.58,21.16 | 18.28,21.77 IC2.E3 | 2.58,27.25 2.58,26.64 v2.43,26.49 | 2.58,27.25 U$2.P$W1 | J1.1 40.36,13.79 40.36,8.34
  Bottom 0.3: v36.87,32.44 v39,32.44 39,23.6 42.81,19.79 42.81,10.79 v40.53,8.51 31.53,8.51 27.42,4.39 21.02,4.39 18.43,1.8 16.75,1.8 14.62,3.94 14.62,4.09 14.01,4.7 v7.61,4.7 7,4.7 6.39,4.09 | v6.08,3.78 6.39,4.09 | 6.39,4.09 4.71,5.77 4.71,6.38 6.08,7.75 v10.2,7.75 10.2,11.56 10.81,12.17 10.81,24.51 11.57,25.27 | v16.9,8.05 16.14,8.05 v15.38,8.81 | v18.58,21.16 15.68,21.16 11.57,25.27 | 10.35,26.49 11.57,25.27 | 10.35,26.49 v2.43,26.49 | 10.35,26.49 v10.2,26.64
3V3/2.4A3
  Top 0.3: C21.2 4.5,26.79 U$2.P$AC5
CUTOUT
  pour Top: 32.95,38.24 31.94,39.25 28.87,39.25 28.82,39.27 28.64,39.45 6.35,39.05 6.35,26.26 6.46,26.15 31.34,26.15 32.95,27.76
DEC4_6  (via drill 0.35)
  Top 0.152: C27.2 1.51,5.77 2.58,5.77 C28.2 2.73,5.77 3.04,6.07 v5.32,6.07 | v8.52,6.07 12.64,6.07 C26.2 | U$5.1 U$6.2 38.7,28.93 v37.02,27.25 | 3.64,31.67 3.95,31.67 U$2.P$B5 | 3.64,31.67 3.49,31.67 U$2.P$B3 | v10.5,30.76 9.13,30.76 U$2.P$E24 | v6.54,32.89 4.86,32.89 3.64,31.67
  Bottom 0.152: v5.32,6.07 v8.52,6.07 13.09,6.07 16.45,2.72 16.45,2.56 16.9,2.11 18.28,2.11 32.6,16.43 32.6,26.49 | v6.54,32.89 9.13,32.89 10.5,31.52 v10.5,30.76 12.33,28.93 12.33,27.71 15.07,24.97 19.8,24.97 21.02,26.19 27.72,26.19 29.55,28.02 31.08,28.02 32.6,26.49 | v37.02,27.25 35.8,27.25 35.04,26.49 32.6,26.49
DN
  Top 0.152: 23,27.71 22.02,28.69 J3.A7 | 23,27.71 23.46,27.71 23.71,27.96 23.71,28.55 J3.B7 | 23,27.71 18.43,27.71 18.12,28.02 15.99,28.02 15.38,27.41 14.16,27.41 D7.1
DP  (via drill 0.35)
  Top 0.152: J3.A6 J3.B6 22.54,29.37 v22.54,29.84 | v15.38,25.58 14.16,25.58 D7.3
  Bottom 0.152: v15.38,25.58 18.28,25.58 v22.54,29.84
EPD_3V3  (via drill 0.35)
  Top 0.152: J2.16 11.57,15.82 11.57,16.13 J2.15 11.57,16.28 v13.4,16.28 | C36.2 15.99,22.53 16.6,21.92 16.75,21.92 17.21,21.46 17.21,19.48 v17.36,19.33 19.19,17.5 20.41,17.5 21.02,18.11 21.02,20.7 22.54,22.22 22.54,23.29 25.44,26.19 Q4.3
  Bottom 0.152: v13.4,16.28 14.31,16.28 v17.36,19.33
GDR  (via drill 0.35)
  Top 0.152: v9.13,6.98 8.06,6.98 R8.2 | Q3.1 13.86,22.07 13.7,21.92 v12.79,21.92 12.03,22.68 11.57,22.68 J2.2
  Bottom 0.152: v9.13,6.98 10.35,6.98 10.81,7.44 10.81,8.51 10.5,8.81 10.5,11.4 12.79,13.69 12.79,19.79 13.4,20.4 13.4,21.31 v12.79,21.92
GND  (via drill 0.35)
  Top 0.152: IC4.B1 24.07,17.65 23.46,18.26 23.46,20.24 23.76,20.55 24.52,20.55 25.13,19.94 C44.2 25.13,19.79 25.13,18.87 25.59,18.41 25.59,17.65 | 25.59,17.65 25.74,17.65 26.66,16.74 26.96,16.74 U1.4 27.12,16.74 27.42,16.74 28.18,17.5 | 25.59,17.65 25.29,17.65 IC4.B3 | 28.18,18.26 29.4,19.48 29.4,19.63 29.71,19.94 C31.2 29.86,19.94 30.47,19.94 32.6,17.8 32.6,14.15 36.87,9.88 | 28.18,17.5 28.18,18.26 | 28.18,18.26 27.12,18.26 U1.1 | C33.2 29.86,8.66 29.86,12.62 30.77,13.54 30.77,15.98 29.55,17.2 29.1,17.2 U1.6 28.94,17.35 28.64,17.35 28.49,17.5 28.18,17.5 | 28.18,17.5 U1.9 | C11.2 19.19,3.02 18.88,2.72 18.88,2.41 C16.1 18.73,2.41 18.43,2.11 17.67,2.11 17.21,2.56 17.21,2.87 | 17.21,2.87 17.21,3.78 C48.2 | SW3.1 13.55,4.85 14.31,5.61 14.92,5.61 R6.2 15.07,5.61 16.75,5.61 | 19.65,7.59 19.8,7.75 C9.1 19.95,7.75 20.41,7.75 21.17,8.51 24.83,8.51 25.44,7.9 25.44,7.44 D5.1 25.44,7.29 25.44,6.68 | 19.65,7.59 19.19,7.14 19.19,6.22 C19.1 19.04,6.22 18.43,5.61 16.75,5.61 | C40.1 13.7,9.88 14.01,10.18 14.01,10.34 14.77,11.1 16.14,11.1 C43.1 16.29,11.1 16.6,10.79 16.6,8.97 IC3.9 16.75,8.81 17.06,8.81 IC3.8 17.06,8.97 17.51,9.42 17.82,9.42 18.43,8.81 | 18.43,8.81 19.65,7.59 | v17.06,2.87 17.21,2.87 | 16.75,5.61 v16.75,5.31 | C47.2 23.91,3.33 23.91,3.94 24.83,4.85 SW2.1 24.98,5 25.44,5.46 25.44,6.68 | 31.69,6.22 31.08,6.83 30.77,6.83 C29.1 30.62,6.98 30.32,6.68 25.44,6.68 | 31.69,6.22 31.69,5.77 C46.2 | 36.11,7.9 36.11,9.12 36.87,9.88 | 36.11,7.9 36.11,6.53 35.5,5.92 35.5,4.85 SW1.1 35.5,4.7 36.11,4.7 37.33,3.48 42.36,3.48 TP12.TP | 31.69,6.22 32.14,6.22 33.82,7.9 36.11,7.9
  Top 0.152: 36.87,9.88 TP6.TP 36.97,15.28 J1.3 J1.5 | 14.62,19.79 11.57,19.79 J2.8 11.42,19.79 10.81,19.79 8.98,21.62 8.98,23.9 J2.MP1 8.98,24.05 9.28,24.05 11.72,26.49 | 14.62,19.79 14.77,19.94 C35.1 14.62,19.79 | 14.77,17.5 14.77,16.74 13.4,15.37 11.57,15.37 J2.17 11.42,15.21 11.11,15.21 8.98,13.08 8.98,11.1 J2.MP2 8.83,10.95 8.83,8.81 8.67,8.66 C42.1 8.52,8.51 | 14.62,18.11 14.62,17.65 14.77,17.5 | 14.62,18.11 14.62,19.79 | 14.77,17.5 C37.1 | C13.2 19.95,16.13 C13.1 | 17.36,14.76 16.29,13.69 C39.1 16.14,13.54 16.14,13.23 15.38,12.47 13.7,12.47 13.55,12.62 13.55,12.78 13.25,13.08 C41.1 | 17.36,14.76 18.58,15.98 19.95,15.98 C13.2 | 16.45,15.67 15.53,15.67 14.92,15.06 C38.1 | 17.36,14.76 16.45,15.67 | 14.62,18.11 16.29,18.11 16.45,17.96 16.45,15.67 | 8.52,8.51 8.06,8.05 8.06,7.59 R8.1 7.91,7.44 7.76,7.44 7.3,6.98 7.3,6.22 | 8.52,8.51 10.35,6.68 12.64,6.68 C26.1 | 2.27,6.38 1.51,6.38 C27.1 | 2.27,6.38 2.58,6.38 C28.1 | 2.43,7.44 2.27,7.29 2.27,6.38 | 2.43,7.44 2.58,7.59 C24.1 2.73,7.59 5.17,7.59 C25.1 5.32,7.44 5.47,7.44 6.54,6.38 C18.1 6.54,6.22 7,6.22 | 1.51,8.36 1.36,8.36 C23.1 | 2.43,7.44 1.51,8.36 | 1.51,8.36 2.43,9.27 2.58,9.27 C20.1 | 7.3,6.22 7,6.22 | 7.3,6.22 7.61,5.92 C22.1 | 6.69,1.8 7.3,1.19 7.76,1.19 R15.2 | 6.69,1.8 6.54,1.8 C8.1 6.69,1.8 | 6.54,5 6.39,5 C17.1 6.24,5.16 1.82,5.16 R9.1 | 6.54,5 6.85,4.7 6.85,4.39 R14.1 7,4.39 7.3,4.09 7.3,3.48 6.69,2.87 6.69,1.8 | 7,6.22 7,5.46 6.54,5 | 30.01,31.67 31.08,32.74 31.08,33.5 C50.2 | 30.01,31.67 29.08,30.74 J3.SH1 25.86,33.35 20.9,33.35 | 27.42,29.08 29.86,26.64 SJ1.1 29.86,24.82 30.62,24.05 32.14,24.05 32.3,24.21 32.3,26.8 R1.2 32.45,26.8 32.91,27.25 32.91,27.56 32.75,27.71
  Top 0.152: 27.42,29.08 29.86,31.52 C3.2 30.01,31.67 | 27.42,29.08 27.35,29.15 | 27.35,29.15 26.59,29.89 J3.A1_B12 | 27.35,29.15 26.91,29.58 J3.SH3 | C2.2 40.98,33.05 40.83,32.89 40.83,31.52 C6.2 40.68,31.37 40.07,30.76 38.09,30.76 | C1.2 36.26,33.65 37.63,33.65 C4.1 37.63,33.5 37.48,33.35 37.48,31.52 C5.2 37.48,31.37 38.09,30.76 | U$4.2 41.59,24.21 41.29,24.51 41.14,24.51 40.22,25.43 U$4.4 40.07,25.43 37.94,25.43 35.65,27.71 C7.1 35.5,27.71 | 32.75,27.71 31.69,28.78 31.69,29.84 IC1.D2 | 32.75,27.71 35.5,27.71 | 38.09,30.76 38.09,30.3 35.5,27.71 | 11.72,26.49 12.03,26.19 C10.1 12.18,26.19 13.25,26.19 | 11.72,26.49 11.72,26.95 12.18,27.41 | 13.25,26.19 13.86,26.19 14.01,26.34 D7.2 | C45.2 22.85,26.49 22.24,27.1 21.32,27.1 20.71,26.49 20.71,25.43 C49.2 20.56,25.27 20.26,24.97 20.26,24.82 19.8,24.36 16.45,24.36 | IC2.B1 17.51,22.68 IC2.C1 17.51,22.53 17.82,22.53 IC2.C2 17.97,22.53 18.28,22.53 IC2.C3 | IC2.B1 17.36,22.99 16.45,23.9 16.45,24.36 | 16.45,24.36 16.29,24.51 15.53,24.51 14.92,23.9 C34.1 | IC2.B1 | C36.1 14.92,22.68 14.92,23.75 C34.1 | 13.25,26.19 13.25,24.97 14.31,23.9 14.77,23.9 C34.1 | 15.83,30.62 15.53,30.91 C15.1 | 15.83,30.62 16.45,30 16.75,30 C14.1 16.9,30 17.67,29.23 19.07,29.23 J3.A12_B1 | 12.33,31.06 15.23,31.06 15.38,30.91 C15.1 | 12.33,31.06 11.72,31.06 9.28,33.5 U$3.1 | 16.47,31.38 16.53,31.35 | J3.SH4 18.18,30.42 16.53,31.35 | 15.83,30.62 J3.SH2 | 8.67,30.15 8.67,30.45 U$2.P$F23 | 8.67,30.15 8.67,30 U$2.P$H23 8.67,29.84 7.91,29.84 7.76,29.69 | 8.67,30.15 9.28,30.15 9.89,29.54 10.35,29.54 C12.2 10.5,29.54 11.72,29.54 | 4.1,30.76 4.41,31.06 4.41,31.67 U$2.P$B7
  Top 0.152: 4.1,28.32 4.1,27.25 U$2.P$87 | 4.1,28.32 U$2.P$83 | 4.1,28.32 U$2.P$74 | U$2.P$79 4.1,29.69 4.1,30.61 U$2.P$74 | 5.32,28.32 5.32,27.25 U$2.P$88 | 5.32,28.32 U$2.P$84 | 5.32,28.32 U$2.P$74 | U$2.P$80 5.32,29.54 U$2.P$74 | 4.1,30.76 U$2.P$75 | 4.1,30.76 U$2.P$74 | U$2.P$76 5.17,30.61 4.71,30.15 U$2.P$74 | U$2.P$89 6.54,27.25 6.54,28.32 U$2.P$74 | U$2.P$85 6.39,28.47 U$2.P$74 | 7.76,28.32 7.76,27.25 U$2.P$90 | 7.76,28.32 U$2.P$86 | 7.76,28.32 U$2.P$74 | U$2.P$74 6.54,29.23 6.54,29.54 U$2.P$81 6.54,29.69 6.54,30.61 U$2.P$77 | 7.76,29.69 U$2.P$74 | 7.76,29.69 7.76,30.61 U$2.P$78 | 7.76,29.69 U$2.P$82 | 12.33,31.06 12.33,30.15 11.72,29.54 | 12.18,27.41 12.18,29.08 11.72,29.54 | 12.18,27.41 C21.1 | 18.73,33.35 20.9,33.35 | 20.41,32.85 J3.SH2 | 18.43,8.81 19.5,9.88 19.5,10.79 20.71,12.01 21.17,12.01 21.48,12.32 21.48,14.6 20.1,15.98 C13.2 | C15.1 15.97,31.35 16.53,31.35 | J3.SH2 20.52,33.73 20.9,33.35
  Bottom 0.152: v17.06,2.87 17.06,5 v16.75,5.31
IMU_INT1
  Top 0.152: U$2.P$N1 17.73,13.62 IC3.5
IMU_INT2
  Top 0.152: U$2.P$P2 17.73,13.87 IC3.6
LX1
  Top 0.152: 18.28,22.99 17.97,22.99 IC2.B2 | 18.28,22.99 IC2.B3 | L1.1 18.28,20.53 18.28,22.99
LX2
  Top 0.152: L1.2 18.68,22.18 IC2.D3 IC2.D2
N$1
  Top 0.152: IC1.D1 31.23,29.84 31.23,28.47 32.3,27.41 R1.1
N$2
  Top 0.152: IC2.E1 17.51,21.77 17.51,21 17.82,20.7 R2.1
N$3
  Top 0.152: R6.1 15.07,6.22 16.14,7.29 IC3.1
N$4
  Top 0.152: IC2.D1 17.52,11.31 R3.1
N$5
  Top 0.152: U$6.1 37.78,28.93 38.39,29.54 40.22,29.54 40.83,28.93 U$5.2
N$6  (via drill 0.35)
  Top 0.152: v9.74,31.37 9.59,31.22 9.13,31.22 8.67,31.67 8.67,32.13 U$2.P$A23 | v28.03,31.52 27.88,31.67 v18.73,31.67 18.73,4.13 C11.1 | v41.75,31.52 41.75,25.43 U$4.3
  Bottom 0.152: v9.74,31.37 8.06,31.37 7.15,32.28 6.24,32.28 5.93,32.59 5.93,33.2 6.24,33.5 16.9,33.5 v18.73,31.67 | v28.03,31.52 34.58,31.52 36.41,33.35 39.92,33.35 v41.75,31.52
N$7  (via drill 0.35)
  Top 0.152: 11.11,30.45 11.11,31.06 10.2,31.98 9.44,31.98 9.13,31.67 U$2.P$B24 | 11.11,30.45 10.81,30.15 10.5,30.15 C12.1 | v17.82,27.41 25.59,27.41 29.25,23.75 32.3,23.75 32.6,24.05 40.07,24.05 U$4.1 | 11.11,30.45 v11.72,30.45
  Bottom 0.152: v17.82,27.41 14.77,27.41 v11.72,30.45
N$8
  Top 0.152: U$2.P$N24 18.83,19.01 C16.2
N$15
  Top 0.152: C33.1 28.79,8.66 28.79,10.79 27.88,11.71 L3.2
N$16
  Top 0.152: C32.2 27.27,22.68 26.66,23.29 25.74,23.29 24.98,22.53 23.61,22.53 D6.2 23.46,22.53 23.46,20.7 22.85,20.09 22.85,17.8 21.17,16.13 | 21.17,16.13 23.15,14.15 23.15,11.86 L3.1 | 21.17,16.13 20.26,17.04 18.73,17.04 16.75,19.02 16.75,20.24 16.14,20.85 16.14,21.31 Q3.3
N$17  (via drill 0.35)
  Top 0.152: v26.2,19.94 26.2,21.31 | 26.2,21.31 26.2,22.53 C32.1 | v20.87,12.62 20.56,12.62 18.58,10.64 D4.1 | v31.08,18.41 31.08,8.81 29.71,7.44 29.1,7.44 D5.2 | 26.2,21.31 v28.18,21.31
  Bottom 0.152: v26.2,19.94 26.2,19.48 23.3,16.59 23.3,15.06 v20.87,12.62 | v28.18,21.31 v31.08,18.41
N$18
  Top 0.152: C34.2 13.78,21.75 J2.4
N$19
  Top 0.152: C31.1 28.79,19.94 27.88,19.94 26.35,18.41 26.35,17.65 26.66,17.35 26.96,17.35 U1.3
N$20
  Top 0.152: J2.5 11.57,21.31 14.62,21.31 15.84,20.09 C35.2
N$21
  Top 0.152: IC4.A2 24.68,18.26 24.68,19.18 24.07,19.79 C44.1
N$23
  Top 0.152: R9.2 1.82,4.7 3.04,3.48 3.8,3.48 R7.1 25.47,25.12 SJ1.2
N$24
  Top 0.152: J2.18 11.57,14.76 13.25,14.76 15.99,17.5 C37.2
N$25
  Top 0.152: J2.19 11.57,14.3 15.23,14.3 15.84,14.91 C38.2
N$26  (via drill 0.35)
  Top 0.152: v15.38,13.38 14.77,14 12.48,14 12.33,13.84 11.57,13.84 J2.20 | v16.45,12.62 17.36,13.54 C39.2
  Bottom 0.152: v15.38,13.38 15.68,13.38 v16.45,12.62
N$27
  Top 0.152: R15.1 20.75,14.76 J3.B5
N$28
  Top 0.152: J2.22 11.57,12.78 11.88,12.78 12.48,13.38 12.48,13.54 12.64,13.69 13.55,13.69 14.01,13.23 C41.2
N$29
  Top 0.152: J3.A5 23.75,20.67 R14.2
N$30
  Top 0.152: J2.24 11.57,11.86 16.45,11.86 17.06,11.25 C43.2
OUT+
  Top 0.152: IC4.A3 33.22,18.2 TP14.TP
OUT-
  Top 0.152: IC4.C3 25.29,17.2 25.74,17.2 28.18,14.76 28.79,14.76 29.4,14.15 TP13.TP
P0.00/XL1
  Top 0.152: U$1.1 21.63,7.29 19.95,7.29 C9.2 3.15,23.93 U$2.P$D2
P0.01/XL2  (via drill 0.35)
  Top 0.152: C10.2 3.76,25.59 v1.51,27.84 | C10.2 7.99,25.59 U$2.P$F2 | U$1.2 12.08,19.51 C10.2
P0.13
  Top 0.152: R11.1 30.32,4.24 30.32,5.16 30.77,5.61 C46.1 30.93,5.61 31.69,4.85 32.45,4.85 SW1.2
P0.14
  Top 0.152: 22.09,4.85 19.8,4.85 18.88,3.94 17.97,3.94 R12.1 | 22.09,4.85 22.85,4.09 22.85,3.33 C47.1 | 22.09,4.85 SW2.2
P1.01  (via drill 0.35)
  Top 0.152: v19.8,6.53 19.8,5.61 19.34,5.16 18.58,5.16 R10.1 | v24.68,23.14 24.68,24.05 Q4.1
  Bottom 0.152: v19.8,6.53 19.8,8.81 21.02,10.03 21.02,11.56 20.26,12.32 20.26,12.93 23,15.67 23,21.46 v24.68,23.14
P1.02
  Top 0.152: C48.1 16.14,3.94 15.23,3.94 R13.1 11.41,3.97 SW3.2
PMIC_INT
  Top 0.152: U$2.P$T2 6.3,31.1 IC1.A1
PREVGH  (via drill 0.35)
  Top 0.152: 11.11,10.03 11.88,9.27 14.01,9.27 C40.2 | 11.11,10.03 10.5,10.64 10.5,12.62 11.11,13.23 11.42,13.23 J2.21 | v19.95,21.46 19.95,22.53 D6.1 | 11.11,10.03 v12.18,11.1
  Bottom 0.152: v19.95,21.46 19.95,18.87 v12.18,11.1
PREVGL  (via drill 0.35)
  Top 0.152: v11.11,9.12 10.66,8.66 9.59,8.66 C42.2 | v11.11,10.95 11.11,11.25 10.81,11.56 10.81,12.01 10.96,12.17 11.42,12.17 J2.23 | v20.1,10.49 21.93,10.49 D4.2
  Bottom 0.152: v11.11,10.95 11.11,10.49 | 11.11,10.49 v11.11,9.12 | 11.11,10.49 v20.1,10.49
RESE  (via drill 0.35)
  Top 0.152: v4.41,4.55 4.41,3.33 4.1,3.02 3.95,3.02 R7.2 | 11.11,22.22 v10.2,21.31 | 11.11,22.22 11.42,22.22 J2.3 | v12.79,20.7 13.86,20.7 Q3.2 | v11.42,24.05 10.81,23.44 10.81,22.53 11.11,22.22
  Bottom 0.152: v4.41,4.55 4.41,6.53 7.3,9.42 7.61,9.42 10.2,12.01 v10.2,21.31 | v12.79,20.7 12.79,21 11.42,22.38 v11.42,24.05
RESET
  Top 0.152: U$2.P$AC13 31.77,26.19 J1.6 43.7,14.26 43.7,9.4 43.91,9.61 TP11.TP
RF  (via drill 0.35)
  Top 0.152: C14.2 16.75,29.39 16.45,29.39 15.53,30.3 C15.2 15.38,30.3 v14.77,30.3 | U$3.2 10.35,33.5 11.72,32.13 11.72,31.98 11.88,31.83 v14.47,31.83 14.47,33.28 ANT1.1
  Bottom 0.152: v14.77,30.3 14.77,31.52 v14.47,31.83
SCL  (via drill 0.35)
  Top 0.152: v24.83,15.52 24.22,16.13 24.22,17.2 IC4.C1 | v30.01,17.65 29.1,17.65 U1.7
  Bottom 0.152: v24.83,15.52 27.88,15.52 v30.01,17.65
SCL/2.4C  (via drill 0.35)
  Top 0.152: 15.23,6.98 16.14,7.9 IC3.12 | 15.23,6.98 14.92,6.68 13.55,6.68 R3.2 3.15,16.9 3.15,22.3 U$2.P$M2 2.7,28.49 R4.2 | v30.47,26.49 30.16,26.8 30.16,29.84 31.08,30.76 31.23,30.76 IC1.B1 | TP3.TP 41.9,9.57 42.81,10.49 42.81,19.79 39.46,23.14 v31.99,23.14 30.93,23.14 28.33,20.55 v26.96,20.55 | v15.07,7.14 15.23,6.98
  Bottom 0.152: v30.47,26.49 30.47,24.66 v31.99,23.14 | v15.07,7.14 16.29,5.92 20.1,5.92 23.91,9.73 23.91,16.74 26.96,19.79 v26.96,20.55
SDA
  Top 0.152: IC4.B2 25.22,18.25 U1.8
SDA/2.4C  (via drill 0.35)
  Top 0.152: v30.77,27.41 30.77,30 31.08,30.3 31.23,30.3 IC1.C1 | v21.32,21.92 19.8,20.4 18.43,20.4 17.97,19.94 R2.2 | v16.75,6.53 16.75,7.14 IC3.2 | R5.2 10.81,28.17 v11.57,28.17 10.55,29.19 U$2.P$L1 | TP4.TP 38.85,9.88 36.11,12.62 35.04,12.62 32.91,14.76 32.91,20.85 v31.23,22.53
  Bottom 0.152: v30.77,27.41 29.4,27.41 27.88,25.88 | 27.88,25.88 22.7,25.88 21.32,24.51 | 21.32,24.51 v21.32,21.92 22.7,20.55 22.7,15.82 19.95,13.08 19.95,12.17 20.71,11.4 20.71,10.18 17.06,6.53 v16.75,6.53 | v11.57,28.17 12.03,27.71 12.03,27.56 15.07,24.51 21.32,24.51 | 27.88,25.88 v31.23,22.53
SWDCLK  (via drill 0.35)
  Top 0.152: v9.89,28.93 9.89,27.41 9.13,26.64 U$2.P$AA24 | v22.09,16.13 23.3,16.13 24.68,14.76 24.83,14.76 25.13,14.45 25.13,9.12 26.5,7.75 26.5,7.44 26.81,7.14 27.42,7.14 27.88,7.59 v27.88,8.36 | v31.69,7.29 v31.69,9.12 | v32.91,6.07 33.97,6.07 34.43,6.53 TP10.TP 34.43,14.01 J1.4
  Bottom 0.152: v9.89,28.93 16.75,22.07 20.26,22.07 22.09,20.24 v22.09,16.13 | v27.88,8.36 30.93,8.36 v31.69,9.12 | v32.91,6.07 v31.69,7.29
SWDIO
  Top 0.152: TP9.TP 34.43,15.28 J1.2 17.2,18.14 U$2.P$AC24
SWO
  Top 0.152: TP8.TP 29.04,4.8 U$2.P$AD22
VBAT
  Top 0.152: TP7.TP 27.09,17.6 U1.2
VBAT/2.5C
  Top 0.152: IC1.C2 32.6,30.3 35.19,32.89 35.19,33.5 C1.1
VBUS  (via drill 0.35)
  Top 0.152: 17.06,26.34 17.97,25.43
  Top 0.3: 17.97,25.43 19.65,25.43 C49.1 19.8,25.43 20.1,25.73 v20.1,26.19 J3.A9_B4 J3.A4_B9 | 17.06,26.34 16.75,26.34 D7.5 | v30.01,32.59 30.01,33.5 C50.1
  Bottom 0.3: v30.01,32.59 28.18,32.59 26.81,31.22 25.13,31.22 v20.1,26.19
VBUS/2.6D
  Top 0.152: 8.55,31.1 U$2.P$AD2
  Top 0.3: 8.55,31.1 IC1.A2 29.46,31.1 C3.1
VREG  (via drill 0.35)
  Top 0.152: C2.1 39.92,33.2 39.61,33.5 38.85,33.5 C4.2 38.7,33.5 38.7,33.05 38.39,32.74 v38.39,31.67 | 17.97,23.44 17.51,23.44 IC2.A1 | 17.97,23.44 18.28,23.44 | 17.97,23.44 IC2.A2 | v32.3,30.91 32.14,30.76 31.69,30.76 IC1.B2 | v34.73,27.1 35.5,27.1 C7.2 | 18.28,23.44 22.09,23.44 24.52,25.88 v24.52,26.8 | 18.28,23.44 IC2.A3 | v42.96,6.22 41.9,7.29 TP2.TP
  Bottom 0.152: 32.3,29.54 v32.3,30.91 | v34.73,27.1 34.28,27.56 | 34.28,27.56 32.3,29.54 | v24.52,26.8 27.88,26.8 30.62,29.54 32.3,29.54 | 34.28,27.56 37.48,30.76 | 37.48,30.76 v38.39,31.67 | v42.96,6.22 42.96,10.49 43.12,10.64 43.12,29.23 39.31,33.05 36.56,33.05 36.26,32.74 36.26,31.98 37.48,30.76